# EAGLE board TMR1_v2 (EAGLE 9.2.0)
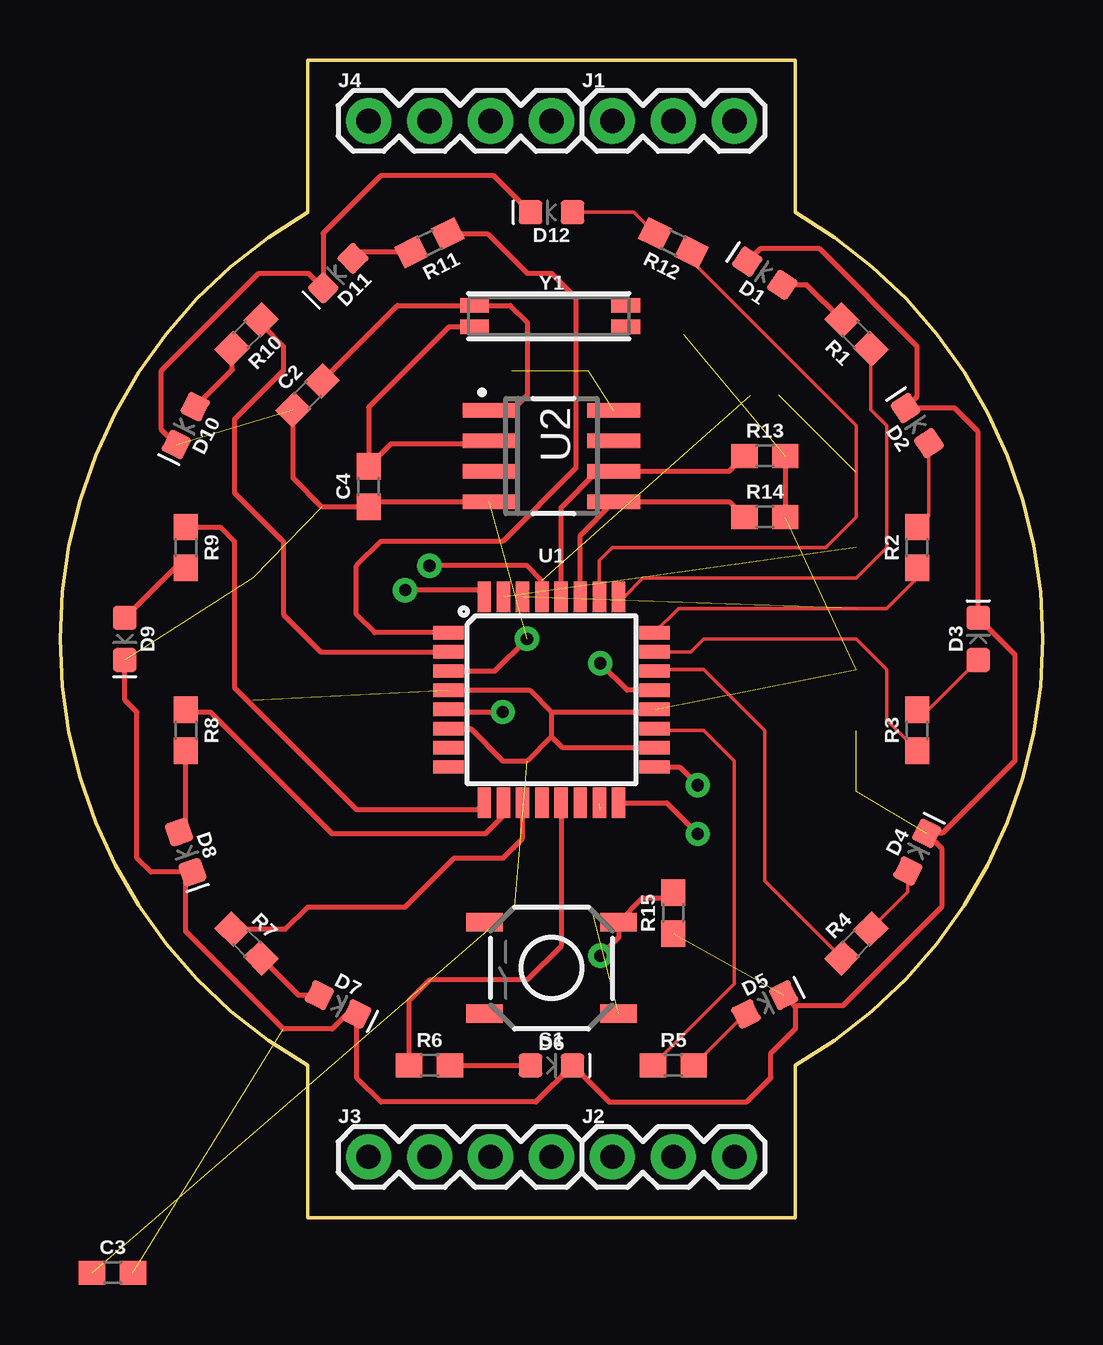
[diagram p0: board, top side]
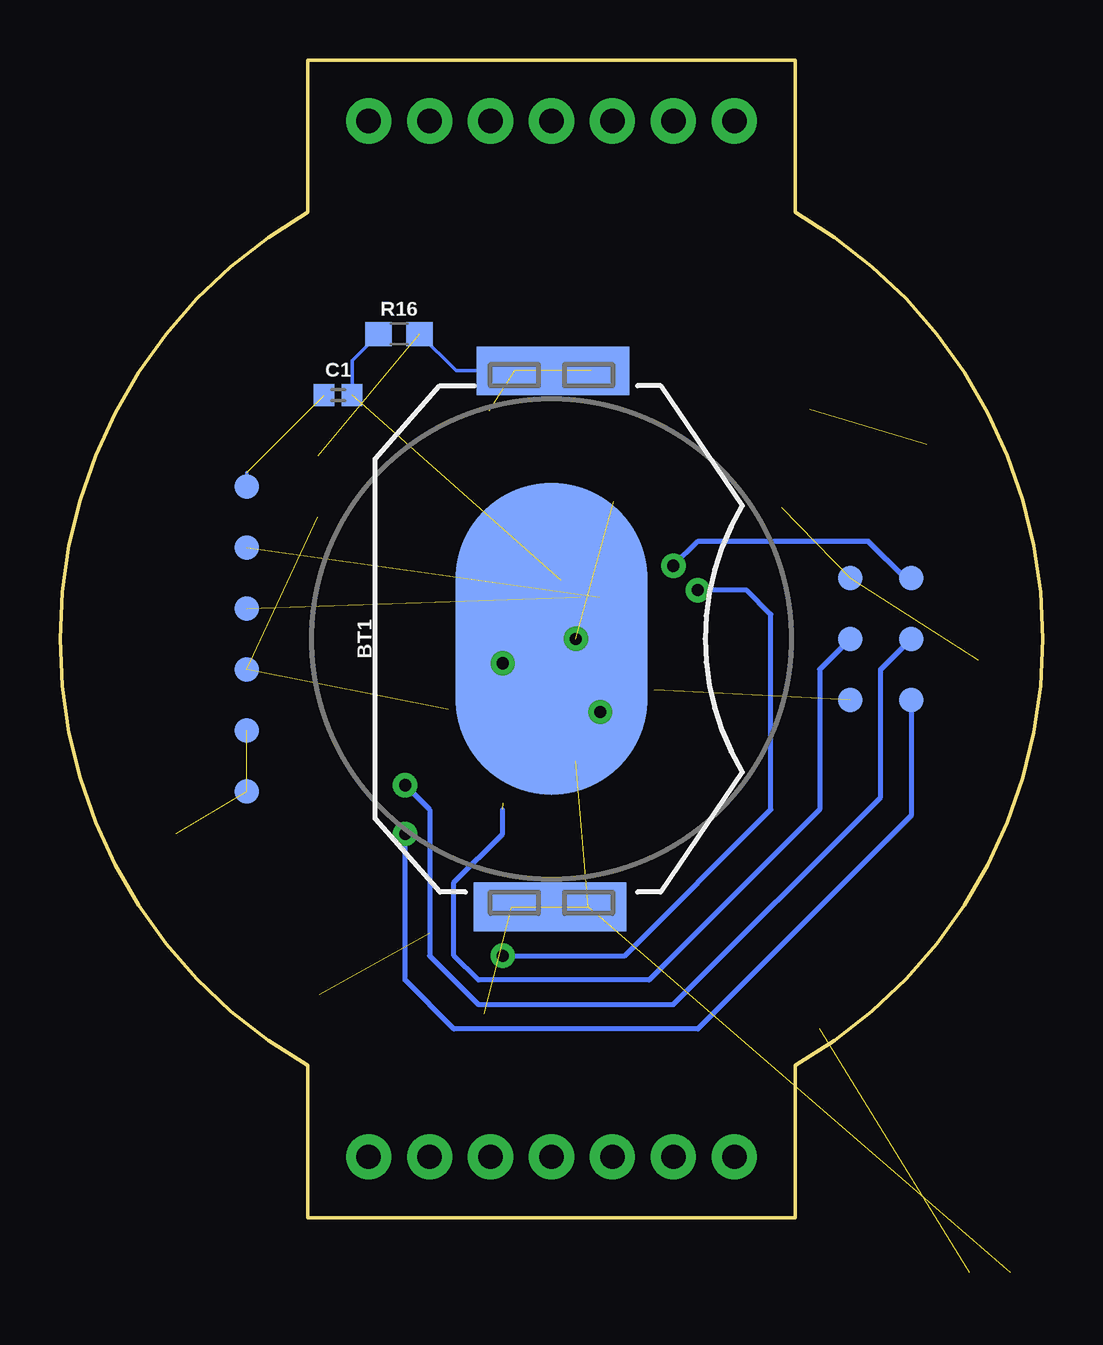
[diagram p1: board, bottom side, seen from below]

Size 40.96 x 48.26 mm. Coordinates in mm from the lower left corner, seen from the top.
Outline: 30.64,41.91 arc-121 30.64,6.35 30.64,0 10.32,0 10.32,6.35 arc-121 10.32,41.91 10.32,48.26 30.64,48.26 30.64,41.91
Copper layers (1*16): Top 0.035mm / dielectric 1.5mm / Bottom 0.035mm
Design rules "SparkFun": minimum track width 8mil, minimum drill 20mil, track to track 8mil, track to pad 8mil, pad to pad 8mil, via to via 8mil, smd to smd 8mil, copper to edge 8mil, drill to drill 8mil, minimum pad ring 12mil, minimum via ring 10mil, stop-mask expansion 4mil, vias tented up to drill 20mil, thermal gap 10mil

## Footprints (pad centres in the part's own frame; a part is rotated, then mirrored left to right if it is on the bottom)
BATTCON_20MM_4LEGS = smd 13 x 8: NEGATIVE 0,0 | smd 2.032 x 3.175: POSITIVE@1 -11.176,1.651; POSITIVE@2 -11.176,-1.524; POSITIVE@3 11.176,1.524; POSITIVE@4 11.176,-1.651
0402 = smd 0.85 x 0.9: 1 -0.58,0; 2 0.58,0
0603 = smd 1.1 x 1: 1 -0.85,0; 2 0.85,0
LED-0603 = smd 1 x 1: A -0.877,0; C 0.877,0
1X03 = drill 1.016 pad 1.88: 1 0,0; 2 2.54,0; 3 5.08,0
1X04 = drill 1.016 pad 1.88: 1 0,0; 2 2.54,0; 3 5.08,0; 4 7.62,0
TACTILE_SWITCH_SMD_5.2MM = smd 1.524 x 0.762: 1 -2.794,1.905; 2 2.794,1.905; 3 -2.794,-1.905; 4 2.794,-1.905
PAD.03X.04 = smd 1.016 x 1.016: P$1 0,0
TQFP32-08 = smd 1.27 x 0.559: 1 -4.293,2.8; 2 -4.293,2; 3 -4.293,1.2; 4 -4.293,0.4; 5 -4.293,-0.4; 6 -4.293,-1.2; 7 -4.293,-2; 8 -4.293,-2.8; 17 4.293,-2.8; 18 4.293,-2; 19 4.293,-1.2; 20 4.293,-0.4; 21 4.293,0.4; 22 4.293,1.2; 23 4.293,2; 24 4.293,2.8 | smd 0.559 x 1.27: 9 -2.8,-4.293; 10 -2,-4.293; 11 -1.2,-4.293; 12 -0.4,-4.293; 13 0.4,-4.293; 14 1.2,-4.293; 15 2,-4.293; 16 2.8,-4.293; 25 2.8,4.293; 26 2,4.293; 27 1.2,4.293; 28 0.4,4.293; 29 -0.4,4.293; 30 -1.2,4.293; 31 -2,4.293; 32 -2.8,4.293
SO8 = smd 0.6 x 2.2: 1 -1.905,-2.6; 2 -0.635,-2.6; 3 0.635,-2.6; 4 1.905,-2.6; 5 1.905,2.6; 6 0.635,2.6; 7 -0.635,2.6; 8 -1.905,2.6
CRYSTAL-SMD-MC-146 = smd 1.2 x 0.6: NC1 6.9,1.2; NC2 6.9,0.3; P$1 0.6,0.3; P$2 0.6,1.2

## Placement (x,y rotation side)
BT1  [BATTCON_20MM_4LEGS]  20.48,24.13 90 bottom
C1  0.1uF  [0402]  29.37,34.29 0 bottom
C2  22pF  [0603]  10.32,34.29 45 top
C3  100nF  [0603]  2.19,-2.29 0 top
C4  22pF  [0603]  12.86,30.48 90 top
D1  [LED-0603]  29.37,39.37 146.3 top
D2  [LED-0603]  35.72,33.02 123.7 top
D3  [LED-0603]  38.26,24.13 90 top
D4  [LED-0603]  35.72,15.24 63.5 top
D5  [LED-0603]  29.37,8.89 26.5 top
D6  [LED-0603]  20.48,6.35 0 top
D7  [LED-0603]  11.59,8.89 333.5 top
D8  [LED-0603]  5.24,15.24 288.5 top
D9  [LED-0603]  2.7,24.13 270 top
D10  [LED-0603]  5.24,33.02 243.5 top
D11  [LED-0603]  11.59,39.37 225 top
D12  [LED-0603]  20.48,41.91 180 top
J1  455-1750-1-ND  [1X03]  23.02,45.72 0 top
J2  455-1750-1-ND  [1X03]  23.02,2.54 0 top
J3  [1X04]  12.86,2.54 0 top
J4  [1X04]  12.86,45.72 0 top
R1  330  [0603]  33.18,36.83 135 top
R2  330  [0603]  35.72,27.94 90 top
R3  330  [0603]  35.72,20.32 90 top
R4  330  [0603]  33.18,11.43 45 top
R5  330  [0603]  25.56,6.35 0 top
R6  330  [0603]  15.4,6.35 0 top
R7  330  [0603]  7.78,11.43 315 top
R8  330  [0603]  5.24,20.32 270 top
R9  330  [0603]  5.24,27.94 270 top
R10  330  [0603]  7.78,36.83 225 top
R11  330  [0603]  15.4,40.64 206.5 top
R12  330  [0603]  25.56,40.64 153.5 top
R13  10k  [0603]  29.37,31.75 0 top
R14  10k  [0603]  29.37,29.21 0 top
R15  10k  [0603]  25.56,12.7 90 top
R16  10k  [0603]  26.83,36.83 0 bottom
S1  MOMENTARY-SWITCH-SPST-SMD-5.2MM  [TACTILE_SWITCH_SMD_5.2MM]  20.48,10.41 180 top
TP1  TEST-POINT3X4  [PAD.03X.04]  33.18,17.78 0 bottom
TP2  TEST-POINT3X4  [PAD.03X.04]  33.18,20.32 0 bottom
TP3  TEST-POINT3X4  [PAD.03X.04]  33.18,22.86 0 bottom
TP4  TEST-POINT3X4  [PAD.03X.04]  33.18,25.4 0 bottom
TP5  TEST-POINT3X4  [PAD.03X.04]  33.18,27.94 0 bottom
TP6  TEST-POINT3X4  [PAD.03X.04]  33.18,30.48 0 bottom
TP7  TEST-POINT3X4  [PAD.03X.04]  5.49,21.59 0 bottom
TP8  TEST-POINT3X4  [PAD.03X.04]  8.03,21.59 0 bottom
TP9  TEST-POINT3X4  [PAD.03X.04]  5.49,24.13 0 bottom
TP10  TEST-POINT3X4  [PAD.03X.04]  8.03,24.13 0 bottom
TP11  TEST-POINT3X4  [PAD.03X.04]  5.49,26.67 0 bottom
TP12  TEST-POINT3X4  [PAD.03X.04]  8.03,26.67 0 bottom
U1  ATMEGA328P_TQFP  [TQFP32-08]  20.48,21.59 0 top
U2  MCP79410I/SN  [SO8]  20.48,31.75 270 top
Y1  32.768kHz  [CRYSTAL-SMD-MC-146]  16.67,36.83 0 top

## Library data of the parts
BT1 = SparkFun-Batteries; PROD_ID: BATT-10373; SF_SKU: PRT-11892
C1 = SparkFun-Capacitors; PROD_ID: CAP-12416
C2-C4 = SparkFun-Capacitors; PROD_ID: CAP-07876
D1-D12 = SparkFun-LED
J1 J2 = SparkFun-Connectors; PROD_ID: XXX-00000
J3 J4 = SparkFun-Connectors; PROD_ID: CONN-09696
R1-R12 = SparkFun-Resistors; PROD_ID: RES-00818
R13-R16 = SparkFun-Resistors; PROD_ID: RES-00824
S1 = SparkFun-Switches; PROD_ID: SWCH-08247; SF_SKU: COM-08720
TP1-TP12 = SparkFun-Connectors
U1 = SparkFun-IC-Microcontroller; PROD_ID: IC-09069
U2 = _hhn_MCP7941X
Y1 = SparkFun-Clocks; PROD_ID: XTAL-09342

## Nets
D1: R1.1 U1.25
D2: R2.1 U1.24
D3: R3.1 U1.23
D4: R4.1 U1.22
D5: R5.1 U1.19
D6: R6.1 U1.13
D7: R7.1 U1.11
D8: R8.1 U1.10
D9: R9.1 U1.9
D10: R10.1 U1.2
D11: R11.1 U1.1
D12: R12.1 U1.26
DTR: C1.1 TP6.P$1
GND: BT1.NEGATIVE C2.1 C3.2 C4.1 D1.C D2.C D3.C D4.C D5.C D6.C D7.C D8.C D9.C D10.C D11.C D12.C R15.1 TP1.P$1 TP2.P$1 TP12.P$1 U1.3 U1.5 U1.21 U2.4
MISO: TP7.P$1 U1.16
MOSI: TP10.P$1 U1.15
N$1: D8.A R8.2
N$2: D7.A R7.2
N$3: D6.A R6.2
N$4: D5.A R5.2
N$5: D4.A R4.2
N$6: D3.A R3.2
N$7: D2.A R2.2
N$8: D1.A R1.2
N$9: C2.2 U2.1 Y1.P$2
N$10: C4.2 U2.2 Y1.P$1
N$18: D9.A R9.2
N$20: D10.A R10.2
N$22: D11.A R11.2
N$24: D12.A R12.2
PUSH: R15.2 S1.3 U1.32
RST: C1.2 R16.1 TP11.P$1 U1.29
RX: TP4.P$1 U1.30
SCK: TP9.P$1 U1.17
SCL: R13.1 U1.28 U2.6
SDA: R14.1 U1.27 U2.5
SS: U1.14
TX: TP5.P$1 U1.31
VBAT: U2.3
VCC: BT1.POSITIVE@1 BT1.POSITIVE@2 BT1.POSITIVE@3 BT1.POSITIVE@4 C3.1 R13.2 R14.2 R16.2 S1.1 TP3.P$1 TP8.P$1 U1.4 U1.6 U1.18 U1.20 U2.8

## Tracks (layer width: path | path; a pad name or v marks a point on that pad's centre or on a via)
D1
  Top 0.152: U1.25 23.5,25.88 24.29,26.67 33.18,26.67 34.45,27.94 34.45,33.02 33.78,33.69 R1.1
D2
  Top 0.152: U1.24 25.78,25.4 34.45,25.4 35.72,26.67 R2.1
D3
  Top 0.152: R3.1 34.45,20.74 34.45,22.86 33.18,24.13 26.83,24.13 26.29,23.59 U1.23
D4
  Top 0.152: R4.1 29.37,14.04 29.37,20.32 26.83,22.86 24.84,22.86 U1.22
D5
  Top 0.152: R5.1 28.1,9.74 28.1,19.05 26.83,20.32 24.84,20.32 U1.19
D6
  Top 0.203: R6.1 14.55,9.06 15.4,9.91 19.46,9.91 20.88,11.32 U1.13
D7
  Top 0.203: R7.1 9.4,12.03 10.32,12.95 14.38,12.95 16.41,14.99 18.45,14.99 19.28,15.82 U1.11
D8
  Top 0.203: R8.1 5.33,21.08 6.25,21.08 11.33,16 17.73,16 18.48,16.75 U1.10
D9
  Top 0.203: R9.1 6.67,28.79 7.27,28.19 7.27,22.1 12.35,17.02 17.4,17.02 U1.9
D10
  Top 0.203: R10.1 8.38,37.24 9.3,36.32 9.3,35.31 7.27,33.27 7.27,30.23 9.3,28.19 9.3,25.15 10.86,23.59 U1.2
D11
  Top 0.203: R11.1 17.81,41.02 19.46,39.37 20.48,39.37 21.49,38.35 21.49,31.24 18.45,28.19 13.37,28.19 12.35,27.18 12.35,25.15 13.11,24.39 U1.1
D12
  Top 0.152: U1.26 22.48,27.4 23.02,27.94 31.91,27.94 33.18,29.21 33.18,33.02 26.32,39.88 R12.1
DTR  (1 unrouted)
  Bottom 0.152: 33.18,31.06 TP6.P$1
GND  (via drill 0.51)  (8 unrouted)
  Top 0.152: D6.C 21.36,5.96
  Top 0.203: C2.1 9.72,30.83 10.91,29.63 C4.1 13.07,29.84 U2.4 | D5.C 30.59,8.84 | 30.59,8.84 30.64,8.8 30.64,7.87 29.62,6.86 29.62,5.84 28.61,4.83 22.88,4.83 D6.C 19.83,4.83 13.37,4.83 12.37,5.82 D7.C 11.96,8.5 11.33,7.87 9.3,7.87 5.24,11.94 5.24,14.13 D8.C 3.78,14.41 3.21,14.99 3.21,21.08 2.7,21.59 D9.C | 30.59,8.84 32.62,8.84 36.73,12.95 36.73,15.4 D4.C 36.76,16.03 39.78,19.05 39.78,23.48 D3.C 38.26,32.77 37.27,33.75 D2.C 35.72,34.24 35.72,36.32 31.65,40.39 29.17,40.39 D1.C | D12.C 18.08,43.43 13.37,43.43 10.97,41.04 D11.C 10.35,39.37 8.29,39.37 4.22,35.31 4.22,32.86 D10.C | U1.5 16.29,21.08 v18.45,21.08 | U1.21 23.63,21.99 v22.51,23.11 | U1.3 18.12,22.79 v19.46,24.13
  Bottom 0.203: v18.45,21.08 20.48,23.11 BT1.NEGATIVE | v22.51,23.11 21.49,23.11 BT1.NEGATIVE | v19.46,24.13 BT1.NEGATIVE
MISO  (via drill 0.51)
  Top 0.203: v26.57,16 25.28,17.3 U1.16
  Bottom 0.203: TP7.P$1 5.49,16.76 14.38,7.87 24.54,7.87 26.57,9.91 v26.57,16
MOSI  (1 unrouted)
  Bottom 0.203: TP10.P$1 9.3,22.86 9.3,17.02 16.41,9.91 23.53,9.91 24.54,10.92 24.54,13.97 22.51,16 22.51,17.02
N$1
  Top 0.203: D8.A 5.24,16.35 R8.2
N$2
  Top 0.203: R7.2 9.93,9.28 D7.A
N$3
  Top 0.203: R6.2 D6.A
N$4
  Top 0.152: R5.2 28.56,8.5 D5.A
N$5
  Top 0.152: R4.2 35.33,13.58 D4.A
N$6
  Top 0.152: R3.2 36.18,21.17 D3.A
N$7
  Top 0.152: D2.A 36.21,29.28 R2.2
N$8
  Top 0.203: R1.2 31.13,38.88 D1.A
N$9
  Top 0.203: C2.2 14.06,38.03 Y1.P$2 18.77,38.03 19.46,37.34 19.46,34.29 18.83,33.65 U2.1
N$10
  Top 0.203: Y1.P$1 16.21,37.13 12.86,33.78 C4.2 13.79,32.26 17.75,32.26 U2.2
N$18
  Top 0.203: D9.A 4.78,27.09 R9.2
N$20
  Top 0.203: D10.A 7.18,35.35 R10.2
N$22
  Top 0.203: D11.A 12.48,40.26 R11.2
N$24
  Top 0.152: R12.2 23.91,41.91 D12.A
PUSH  (via drill 0.51)
  Top 0.152: 25.34,13.34 R15.2
  Top 0.203: 25.34,13.34 24.29,13.34 S1.3 23.27,11.68 v22.51,10.92 | U1.32 17.4,26.16 v14.38,26.16
  Bottom 0.203: v22.51,10.92 17.43,10.92 11.33,17.02 11.33,25.15 12.35,26.16 v14.38,26.16
RST  (via drill 0.51)  (1 unrouted)
  Top 0.203: U1.29 20.08,26.56 19.46,27.18 v15.4,27.18
  Bottom 0.152: R16.1 28.79,35.72 C1.2
  Bottom 0.203: TP11.P$1 5.75,26.67 7.27,28.19 14.38,28.19 v15.4,27.18
RX  (1 unrouted)
SCK  (via drill 0.51)
  Top 0.203: U1.17 25.82,18.79 v26.57,18.03
  Bottom 0.203: TP9.P$1 6.76,22.86 6.76,17.53 15.4,8.89 23.53,8.89 25.56,10.92 25.56,17.02 v26.57,18.03
SCL
  Top 0.203: U1.28 20.88,29.61 22.38,31.11 U2.6 27.88,31.11 R13.1
SDA
  Top 0.203: U1.27 21.68,28.45 U2.5 27.88,29.84 R14.1
TX  (1 unrouted)
VCC  (10 unrouted)
  Top 0.203: R13.2 R14.2 | U1.4 19.57,21.99 20.48,21.08 | 20.48,21.08 20.48,20.07 | 20.48,20.07 19.46,19.05 18.45,19.05 17.11,20.39 U1.6 | 20.48,21.08 24.66,21.08 U1.20 | U1.18 20.95,19.59 20.48,20.07
  Bottom 0.152: R16.2 24.45,35.31 BT1.POSITIVE@3